# Altium PCB PCB3.PcbDoc
Units mm, origin at the board's own origin, x right, y up, seen from the top; angles counter-clockwise.
Board outline 12 x 12 mm, 2 copper layers (Top Layer, Bottom Layer); 13 components, 12 nets, 40 pads, 29 vias.
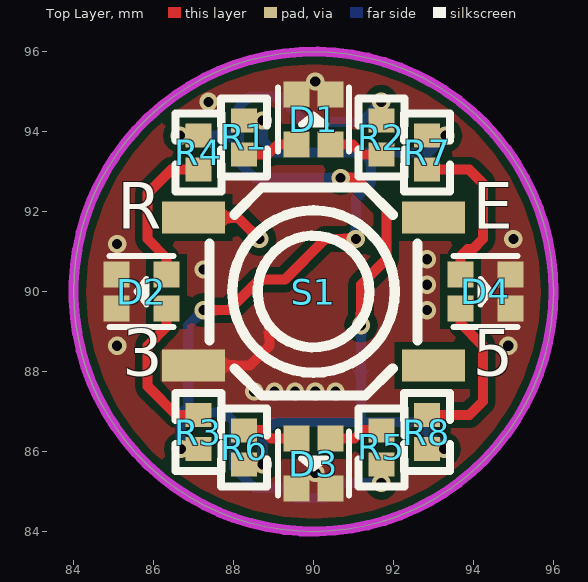
[diagram p0: Top Layer view]
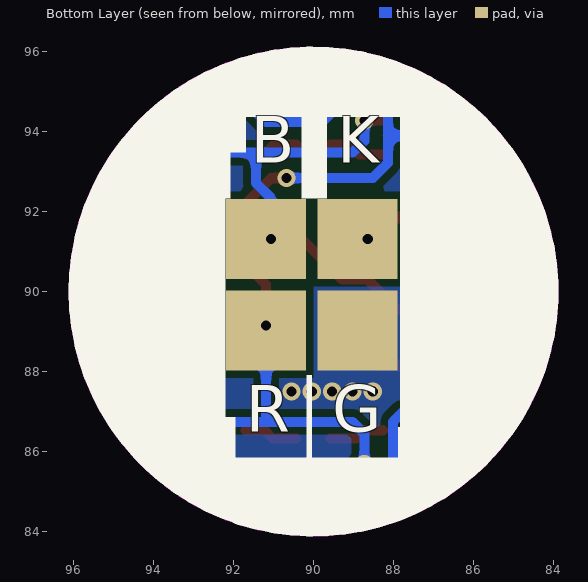
[diagram p1: Bottom Layer view, seen from below]
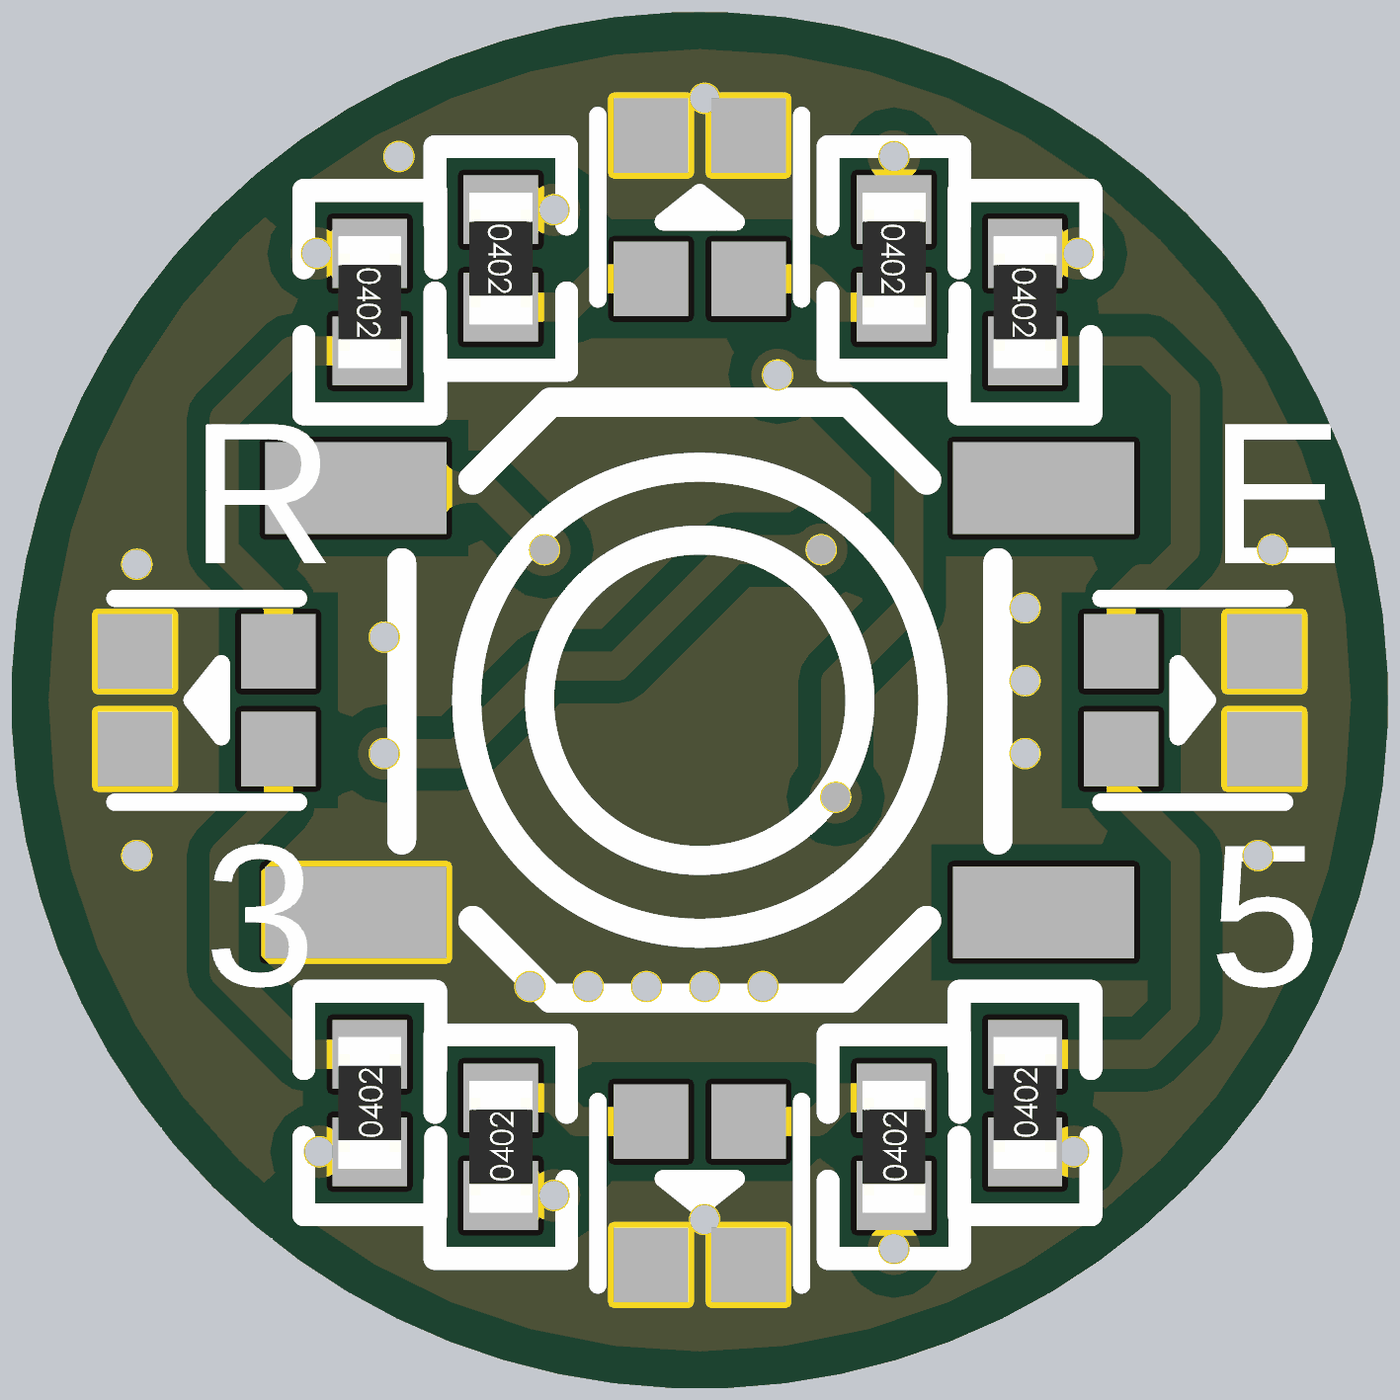
[diagram p2: 3D render of the assembled board from above, using the file's embedded part models]

## Layer stack, top to bottom
Top Solder: solder mask 0.0102, Solder Resist, Dk 3.5
Top Layer: signal copper 0.0356
Dielectric 1: dielectric 0.32, FR-4, Dk 4.8
Bottom Layer: signal copper 0.0356
Bottom Solder: solder mask 0.0102, Solder Resist, Dk 3.5

## Board outline
90,84 cw(c90,90) 84,90 cw(c90,90) 90,96 cw(c90,90) 96,90 cw(c90,90)

## Design rules (kind name [scope] priority, off if disabled: settings)
Clearance [All] p1: gap=0.193
PolygonConnect PolygonConnect_1 [IsVia] p1: connectstyle=Direct reliefconductorwidth=0.254 reliefentries=4 polygonreliefangle="90 Angle" airgapwidth=0.254
PolygonConnect [All] p2: connectstyle=Direct reliefconductorwidth=0.254 reliefentries=4 polygonreliefangle="90 Angle" airgapwidth=0.254
RoomDefinition main [InComponentClass('main')] p1: confinementstyle=ConfineIn formatcopy=TRUE lockcomponents=FALSE outline 178.943,26.924 203.835,26.924 203.835,35.306 178.943,35.306
RoutingVias [All] p1: holewidth=0.711 width=1.27 viastyle="Through Hole" minholewidth=0.711 minwidth=1.27 maxholewidth=0.711 maxwidth=1.27
SolderMaskExpansion [All] p1: expansion=0.102
Width [All] p1: maxlimit=3 minlimit=0.203 preferedwidth=0.254
30 further rules are at their usual default settings.

## Components (designator, comment, footprint, x,y, rotation, side; value= is the part's Value field where it differs from the comment)
D1 "0606 双色LED" LED-SMD_4P-L1.6-W1.5-TL-1 90,94.3 r270 top locked
D2 "0606 双色LED" LED-SMD_4P-L1.6-W1.5-TL-1 85.7,90 r0 top locked
D3 "0606 双色LED" LED-SMD_4P-L1.6-W1.5-TL-1 90,85.7 r90 top locked
D4 "0606 双色LED" LED-SMD_4P-L1.6-W1.5-TL-1 94.3,90 r180 top locked
R1 "2.43KΩ (2431) ±1%" 0402_R 88.265,93.853 r270 top
R2 "1KΩ (1001) ±1%" 0402_R 91.694,93.853 r270 top
R3 "2.43KΩ (2431) ±1%" 0402_R 87.122,86.487 r90 top
R4 "1KΩ (1001) ±1%" 0402_R 87.122,93.472 r270 top
R5 "2.43KΩ (2431) ±1%" 0402_R 91.694,86.106 r90 top
R6 "1KΩ (1001) ±1%" 0402_R 88.265,86.106 r90 top
R7 "2.43KΩ (2431) ±1%" 0402_R 92.837,93.472 r270 top
R8 "1KΩ (1001) ±1%" 0402_R 92.837,86.487 r90 top
S1 "4x4轻触" SW-SMD_4P-L5.2-W5.2-P3.70-LS6.4 90,90 r0 top locked

## Footprints (in the part's own frame and the unit in brackets; to place one, negate y for a bottom-side part, rotate by r counter-clockwise, add the part's x,y. Pads: shape width x height; smd on the part's side, far side on the other; paste and mask are expansions set on the pad)
0402_R [mm]
  rect 0.6x0.65 smd mask+0.051: 1(-0.425,0) 2(0.425,0)
  silkscreen extent -0.97,-0.58 0.97,0.58, body extent -0.57,-0.27 0.58,0.28, height 0.41
LED-SMD_4P-L1.6-W1.5-TL-1 [mm]
  rect 0.65x0.65 smd mask+0.051: 1(-0.625,0.425) 2(-0.625,-0.425) 3(0.625,-0.425) 4(0.625,0.425)
  silkscreen extent -0.8,-0.89 0.8,0.89
SW-SMD_4P-L5.2-W5.2-P3.70-LS6.4 [mm]
  rect 1.58x0.8 smd mask+0.051: 1(-3,1.85) 2(3,1.85) 3(-3,-1.85) 4(3,-1.85)
  silkscreen extent -2.6,-2.6 2.6,2.6

## Part data
D1 D2 D3 D4: library part "0606DualColor LED", "0606 双色LED 红色/翠绿"
R1 R3 R5 R7: library part "0402 2KΩ (2001) 1%", "贴片电阻"
R2 R4 R6 R8: library part "0402 1KΩ (1001) 1%", "贴片电阻"
S1: library part SW-PB, "Switch"

## Free pads (board coordinates)
  rect 2x2 smd far side mask+0.05: 0(88.9,91.313) 1(88.9,89.027) 2(91.186,89.027) 3(91.186,91.313)

## Via types
v1: diameter 0.457, hole 0.254, Top Layer to Bottom Layer, tented both sides, 29 vias

## Nets (pads, with @x,y where several pads share a name; then routed paths per layer and width w, separated by ;. In a path a pad name is that pad's centre, name@x,y a point inside that pad or via, vN(x,y) a via of type N, cw(c..) or ccw(c..) an arc to the next point about the centre after c; other vN are vias at no path point)
GND: D1.1 D1.2 D2.1 D2.2 D3.1 D3.2 D4.1 D4.2 pad.1 S1.3 | length 2.6
  Top Layer w0.254: S1.3 88.404,88.15 88.9,88.646 88.9,89.154
  other v1: 90.043,85.471 88.519,87.503 89.027,87.503 89.535,87.503 90.043,87.503 90.551,87.503 85.09,88.646 94.869,88.646 92.837,89.535 92.837,90.17 87.249,90.551 92.837,90.805 85.09,91.186 94.996,91.313 87.376,94.742 90.043,95.25
GR: pad.3 R1.1 R3.1 R5.1 R7.1 | length 24.4
  Top Layer w0.254: v1(86.682,86.062) R3.1 ; v1(87.249,89.535) 87.884,89.535 88.646,90.297 89.281,90.297 90.297,91.313 v1(91.059,91.313) ; R1.1 v1(88.729,94.278) ; v1(91.694,85.217) R5.1 ; R7.1 v1(93.301,93.897)
  Bottom Layer w0.254: v1(86.682,86.062) 86.682,86.936 86.868,87.122 ; v1(87.249,89.535) 86.868,89.154 86.868,87.122 ; v1(88.729,94.278) 88.729,93.77 89.027,93.472 91.44,93.472 ; v1(91.059,91.313) 91.059,92.329 91.44,92.71 91.44,93.472 ; v1(91.694,85.217) 90.678,85.217 90.297,84.836 89.535,84.836 89.281,85.09 88.519,85.09 88.011,85.598 88.011,86.741 87.78,86.972 87.018,86.972 86.868,87.122 ; v1(93.301,93.897) 92.876,93.472 91.44,93.472
KEY: pad.0 S1.1 | length 1.9
  Top Layer w0.254: S1.1 88.109,91.85 v1(88.646,91.313)
NetD1_3: D1.3 R1.2 | length 1.4
  Top Layer w0.254: R1.2 88.856,93.428 89.103,93.675 D1.3
NetD1_4: D1.4 R2.2 | length 1.4
  Top Layer w0.254: D1.4 90.983,93.675 91.23,93.428 R2.2
NetD2_3: D2.3 R3.2 | length 3.7
  Top Layer w0.254: D2.3 86.325,89.119 85.852,88.646 85.852,87.63 86.57,86.912 R3.2
NetD2_4: D2.4 R4.2 | length 3.7
  Top Layer w0.254: D2.4 86.325,90.84 85.852,91.313 85.852,92.456 86.443,93.047 R4.2
NetD3_3: D3.3 R5.2 | length 1.4
  Top Layer w0.254: D3.3 91.024,86.325 91.23,86.531 R5.2
NetD3_4: D3.4 R6.2 | length 1.4
  Top Layer w0.254: R6.2 88.729,86.531 88.935,86.325 D3.4
NetD4_3: D4.3 R7.2 | length 4.1
  Top Layer w0.254: R7.2 93.897,93.047 94.234,92.71 94.234,91.313 93.98,91.059 93.853,91.059 93.675,90.881 D4.3
NetD4_4: D4.4 R8.2 | length 4.1
  Top Layer w0.254: R8.2 93.897,86.912 94.234,87.249 94.234,88.646 93.675,89.205 D4.4
RED: pad.2 R2.1 R4.1 R6.1 R8.1 | length 23.7
  Top Layer w0.254: v1(86.658,93.897) R4.1 ; R6.1 v1(88.729,85.681) ; v1(90.678,92.837) 91.059,92.837 91.821,92.075 91.821,90.805 91.186,90.17 v1(91.186,89.154) ; R8.1 v1(93.262,86.062)
  Bottom Layer w0.254: v1(86.658,93.897) 88.138,93.897 ; v1(88.729,85.681) 88.729,86.443 89.027,86.741 91.059,86.741 ; v1(90.678,92.837) 88.519,92.837 88.138,93.218 88.138,94.195 88.138,94.615 88.392,94.869 89.154,94.869 89.789,94.234 91.186,94.234 v1(91.694,94.742) ; pad.2 91.186,86.868 91.059,86.741 ; v1(93.262,86.062) 92.583,86.741 91.059,86.741
pads on no net: S1.2 S1.4

## Polygon pours and split planes (outlines as drawn)
GND on Top Layer "Component Side-No Net 1" (solid, remove dead copper, pour order 2): 81.28,97.028 98.044,97.028 99.949,95.123 99.822,94.996 99.822,84.709 99.822,83.439 99.441,83.058 98.552,82.169 81.153,82.169
GND on Bottom Layer "Component Side-No Net 1" (solid, remove dead copper, pour order 4): 81.788,98.171 82.55,98.933 100.076,98.933 100.076,83.693 100.965,82.804 100.076,81.915 81.407,81.915

## Keep-outs
Keep-Out Layer:
  circle w0.254: c90,90 r6

## Silkscreen, mask and mechanical layers (free items; w line width, h text height)
Top Overlay:
  text "R" at 85.09,91.186 h2
  text "E" at 93.98,91.186 h2
  text "3" at 85.217,87.503 h2
  text "5" at 93.98,87.503 h2
Bottom Overlay:
  circle w1.25: c90,90 r5.5
  rectangle: 86.614,93.218 87.84,94.626
  rectangle: 85.471,91.694 86.614,93.218
  rectangle: 84.836,88.265 85.852,92.964
  rectangle: 85.725,86.614 86.614,87.376
  rectangle: 87.63,84.709 92.202,85.852
  rectangle: 86.614,85.344 87.884,86.614
  rectangle: 91.948,85.217 92.964,86.106
  rectangle: 92.71,85.598 93.472,86.868
  rectangle: 93.853,87.503 94.996,92.71
  rectangle: 91.694,93.472 93.345,94.742
  rectangle: 87.63,94.361 92.456,95.123
  rectangle: 90.043,84.836 90.17,87.917
  rectangle: 86.233,92.329 87.84,93.726
  rectangle: 85.217,87.376 86.614,92.202
  rectangle: 86.106,86.233 87.84,92.329
  rectangle: 91.948,85.852 92.964,86.868
  rectangle: 92.202,86.36 94.361,92.583
  rectangle: 92.075,92.329 94.107,93.853
  rectangle: 89.662,92.329 90.297,94.488
  text "K" at 89.408,92.837 h2
  text "B" at 91.567,92.837 h2
  text "G" at 89.535,86.106 h2
  text "R" at 91.694,86.106 h2